# EAGLE board v002 (EAGLE 6.4)
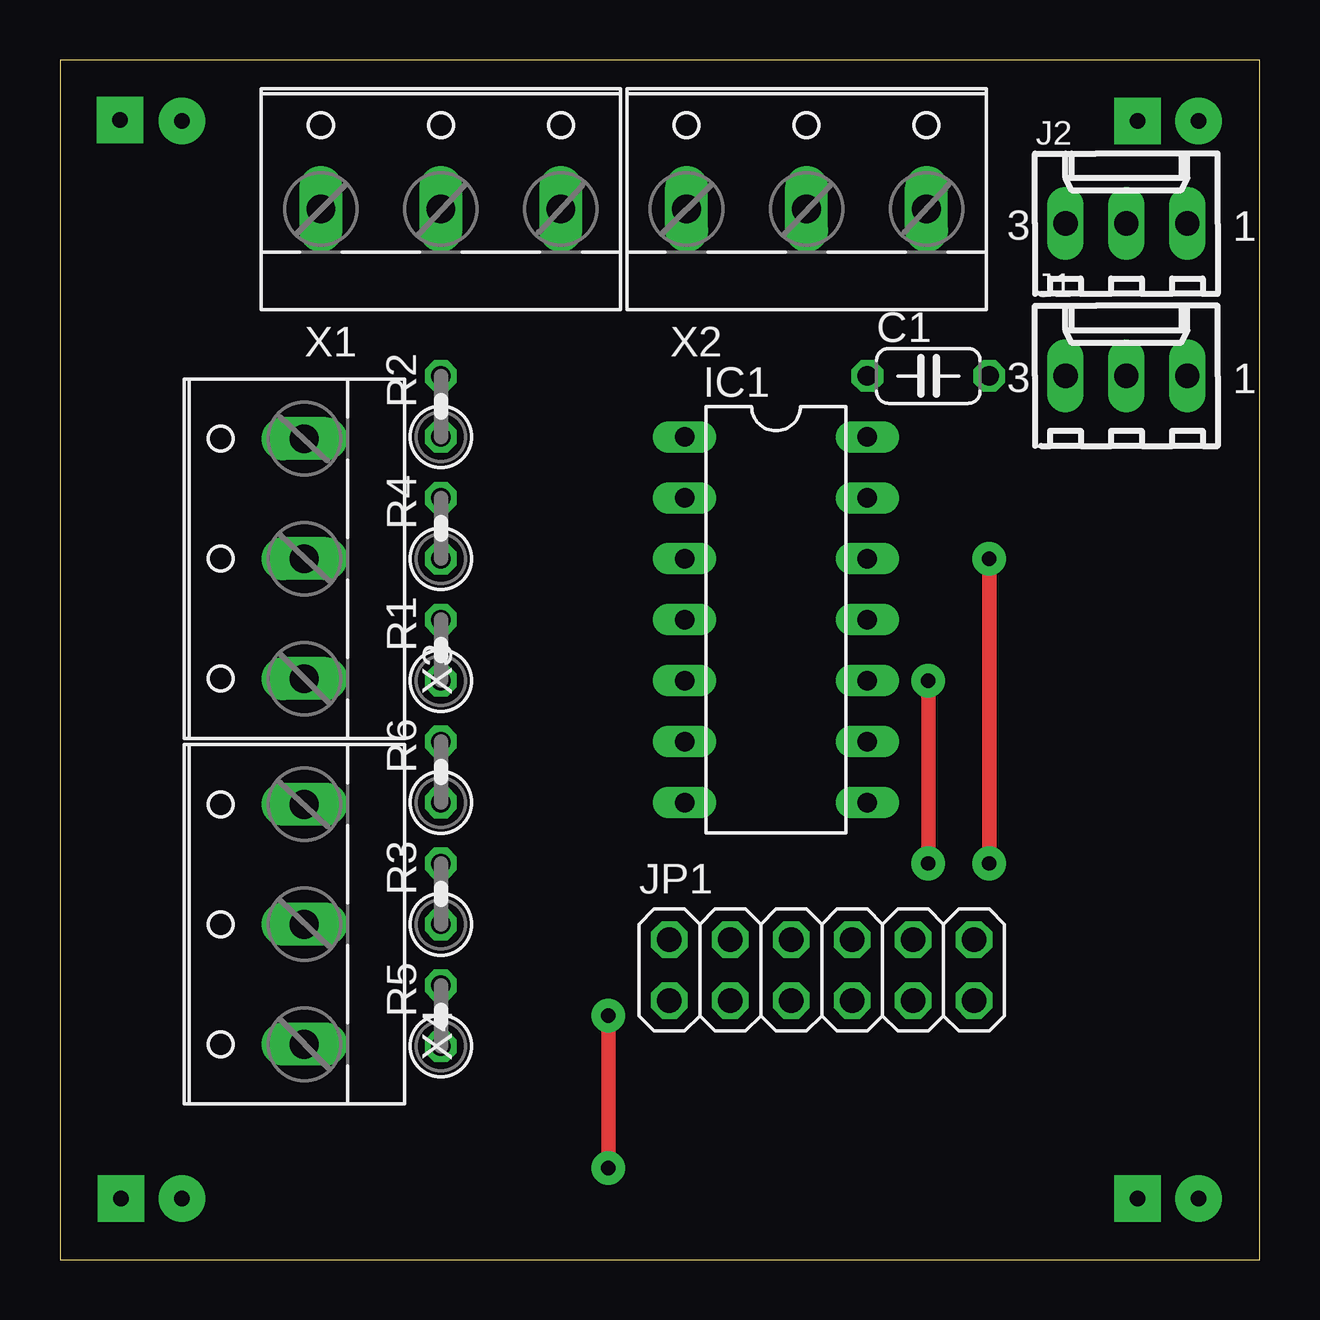
[diagram p0: board, top side]
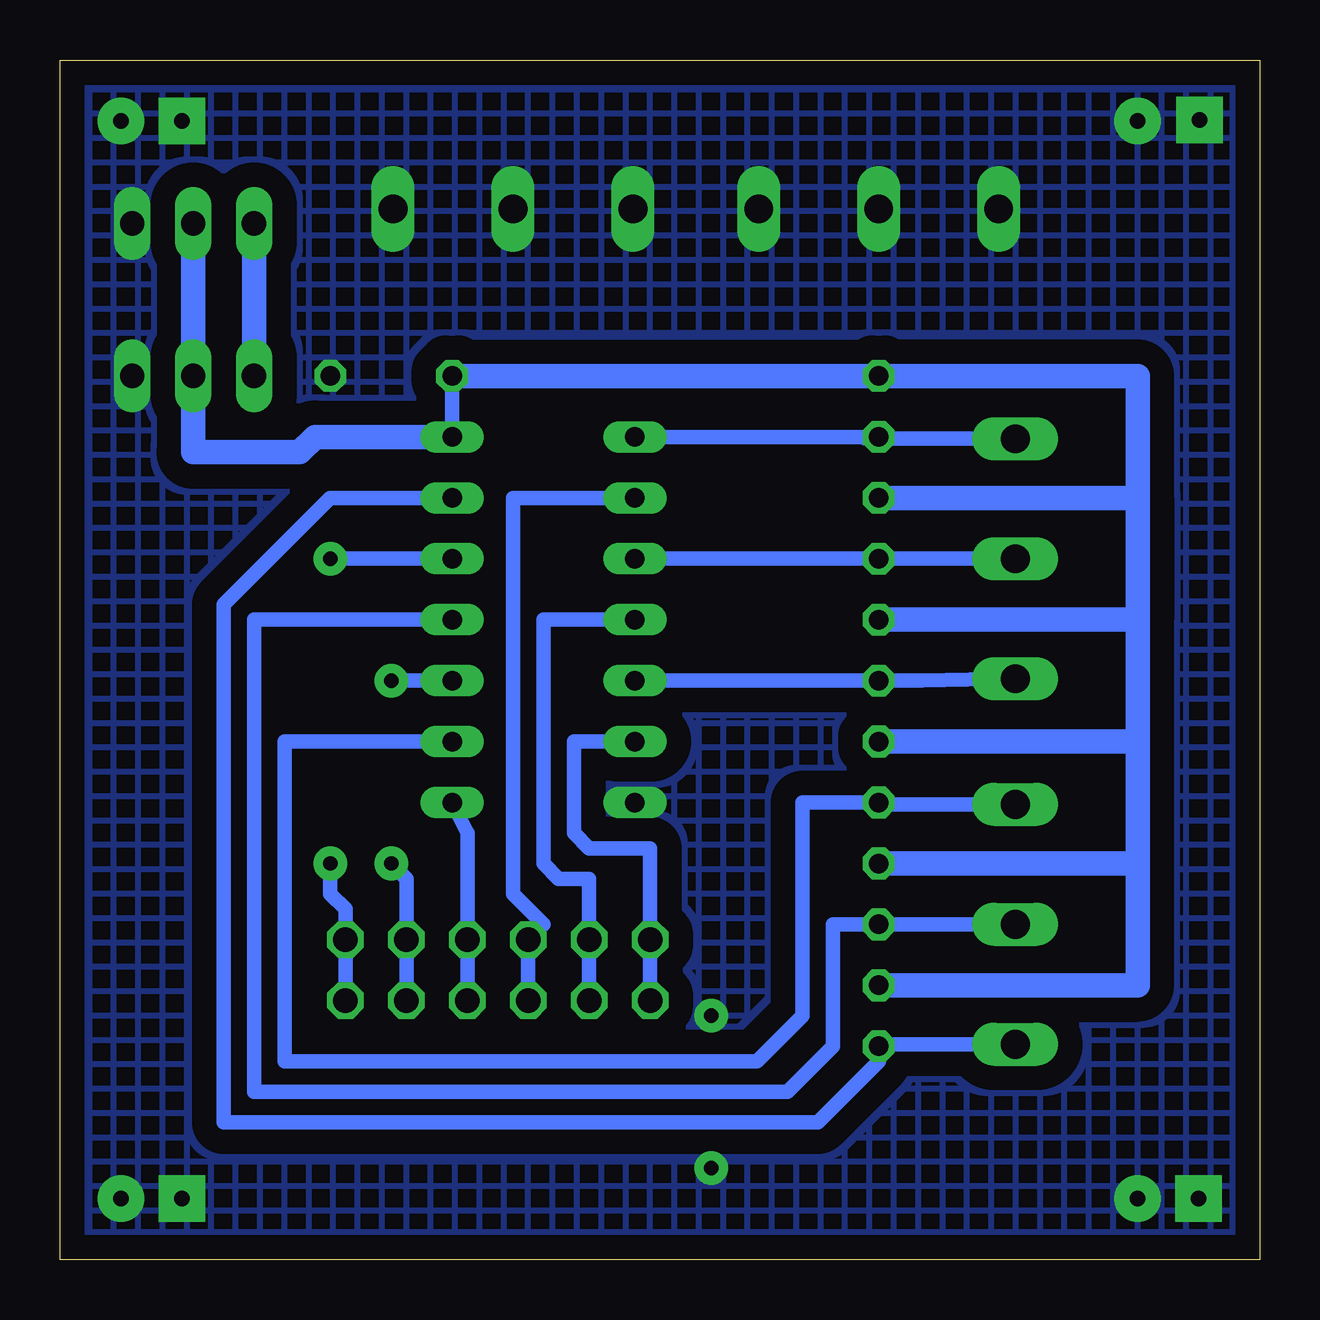
[diagram p1: board, bottom side, seen from below]

Size 50 x 50 mm. Coordinates in mm from the lower left corner, seen from the top.
Outline: 0,0 50,0 50,50 0,50 0,0
Copper layers (1*16): Top 0.035mm / dielectric 1.5mm / Bottom 0.035mm
Design rules "default": minimum track width 10mil, minimum drill 24mil, track to track 8mil, track to pad 8mil, pad to pad 8mil, via to via 8mil, smd to smd 8mil, copper to edge 40mil, drill to drill 8mil, minimum pad ring 10mil, minimum via ring 8mil, stop-mask expansion 4mil, vias tented up to drill 0mil, thermal gap 10mil

## Footprints (pad centres in the part's own frame; a part is rotated, then mirrored left to right if it is on the bottom)
C050-024X044 = drill 0.813 octagon: 1 -2.54,0; 2 2.54,0
DIL14 = drill 0.813 long: 1 -7.62,-3.81; 2 -5.08,-3.81; 3 -2.54,-3.81; 4 0,-3.81; 5 2.54,-3.81; 6 5.08,-3.81; 7 7.62,-3.81; 8 7.62,3.81; 9 5.08,3.81; 10 2.54,3.81; 11 0,3.81; 12 -2.54,3.81; 13 -5.08,3.81; 14 -7.62,3.81
6410-03 = drill 1.016 long: 1 2.54,0; 2 0,0; 3 -2.54,0
2X06 = drill 1.016 octagon: 1 -6.35,-1.27; 2 -6.35,1.27; 3 -3.81,-1.27; 4 -3.81,1.27; 5 -1.27,-1.27; 6 -1.27,1.27; 7 1.27,-1.27; 8 1.27,1.27; 9 3.81,-1.27; 10 3.81,1.27; 11 6.35,-1.27; 12 6.35,1.27
ZZZ_MODULE_05X05 = drill 0.64 pad 1.93 square: GND@1 2.5,47.5; GND@2 44.92,47.46; GND@7 2.54,2.54; GND@8 44.92,2.54 | drill 0.64 pad 1.93: GND@3 47.46,47.46; GND@4 5.08,47.46; GND@5 47.46,2.54; GND@6 5.08,2.54
0207/2V = drill 0.813 octagon: 1 -1.27,0; 2 1.27,0
W237-103 = drill 1.194 long: 1 -5,-1.29; 2 0,-1.29; 3 5,-1.29

## Placement (x,y rotation side)
C1  0.1uF  [C050-024X044]  36.2,36.83 0 top
IC1  7404  [DIL14]  29.84,26.67 270 top
J1  Pwr-1  [6410-03]  44.45,36.83 0 top
J2  Pwr-2  [6410-03]  44.45,43.18 0 top
JP1  Output  [2X06]  31.75,12.06 0 top
PCB1  ZZZ_MODULE05X05  [ZZZ_MODULE_05X05]  0,0 0 top
R1  10K  [0207/2V]  15.88,25.4 90 top
R2  10K  [0207/2V]  15.88,35.56 90 top
R3  10K  [0207/2V]  15.88,15.24 90 top
R4  10K  [0207/2V]  15.88,30.48 90 top
R5  10K  [0207/2V]  15.88,10.16 90 top
R6  10K  [0207/2V]  15.88,20.32 90 top
X1  GND  [W237-103]  15.88,45.09 0 top
X2  GND  [W237-103]  31.11,45.09 0 top
X3  [W237-103]  8.89,29.21 90 top
X4  [W237-103]  8.89,13.97 90 top

## Library data of the parts
C1 = rcl
IC1 = 45xx
J1 J2 = con-molex; OC_FARNELL: unknown; OC_NEWARK: unknown
JP1 = pinhead
PCB1 = GNLib
R1-R6 = resistor
X1-X4 = con-wago-500; MPN: 237-103; OC_FARNELL: unknown; OC_NEWARK: 18M7116

## Nets
+5V: C1.1 IC1.14 J1.2 J2.2 R1.2 R2.2 R3.2 R4.2 R5.2 R6.2
+12V: J1.3 J2.3
GND: C1.2 IC1.7 J1.1 J2.1 PCB1.GND@1 PCB1.GND@2 PCB1.GND@3 PCB1.GND@4 PCB1.GND@5 PCB1.GND@6 PCB1.GND@7 PCB1.GND@8 X1.1 X1.2 X1.3 X2.1 X2.2 X2.3
N$1: IC1.2 JP1.5 JP1.6
N$2: IC1.1 R2.1 X3.3
N$3: IC1.6 JP1.1 JP1.2
N$4: IC1.5 R1.1 X3.1
N$6: IC1.11 R3.1 X4.2
N$7: IC1.10 JP1.9 JP1.10
N$8: IC1.3 R4.1 X3.2
N$9: IC1.12 JP1.11 JP1.12
N$10: IC1.13 R5.1 X4.1
N$11: IC1.8 JP1.7 JP1.8
N$12: IC1.9 R6.1 X4.3
N$13: IC1.4 JP1.3 JP1.4

## Tracks (layer width: path | path; a pad name or v marks a point on that pad's centre or on a via)
+5V
  Bottom 0.61: C1.1 IC1.14
  Bottom 1.016: 5.08,31.75 5.08,36.83 R2.2 C1.1 | R4.2 5.08,31.75 | 5.08,31.75 5.08,26.67 | R1.2 5.08,26.67 | R6.2 5.08,21.59 | 5.08,21.59 5.08,26.67 | R3.2 5.08,16.51 | 5.08,16.51 5.08,21.59 | R5.2 5.08,11.43 5.08,16.51 | J2.2 J1.2 44.45,33.66 40.01,33.66 39.37,34.29 IC1.14
+12V
  Bottom 1.016: J2.3 J1.3
GND  (via drill 0.6 pad 1.4)
  Top 0.61: v22.86,10.16 v22.86,3.81
  pour Bottom (isolate 1.016, no thermals, hatched): 50.16,50.16 0,50.16 0,0 50.16,0
N$1
  Bottom 0.61: IC1.2 31.11,31.75 31.11,15.24 29.84,13.97 JP1.6 JP1.5
N$2
  Bottom 0.61: IC1.1 16.51,34.29 | 16.51,34.29 R2.1 | X3.3 16.43,34.21 16.51,34.29
N$3
  Bottom 0.61: JP1.1 JP1.2 25.4,17.14 27.94,17.14 28.57,17.78 28.57,21.59 IC1.6
N$4
  Bottom 0.61: X3.1 14.07,24.13 R1.1 IC1.5
N$6
  Bottom 0.61: IC1.11 41.91,26.67 41.91,6.99 19.68,6.99 17.78,8.89 17.78,13.97 R3.1 X4.2
N$7  (via drill 0.6 pad 1.4)
  Top 0.61: v36.2,24.13 v36.2,16.51
  Bottom 0.61: JP1.9 JP1.10 35.56,15.88 v36.2,16.51 | IC1.10 v36.2,24.13
N$8
  Bottom 0.61: X3.2 R4.1 IC1.3
N$9  (via drill 0.6 pad 1.4)
  Top 0.61: v38.73,16.51 v38.73,29.21
  Bottom 0.61: JP1.11 JP1.12 38.1,14.61 38.73,15.24 v38.73,16.51 | v38.73,29.21 IC1.12
N$10
  Bottom 0.61: IC1.13 38.73,31.75 43.18,27.3 43.18,5.71 18.41,5.71 15.88,8.26 R5.1 15.79,8.97 X4.1
N$11
  Bottom 0.61: JP1.7 JP1.8 33.02,17.78 IC1.8
N$12
  Bottom 0.61: IC1.9 40.64,21.59 40.64,8.26 20.95,8.26 19.05,10.16 19.05,19.05 R6.1 15.79,18.97 X4.3
N$13
  Bottom 0.61: IC1.4 29.84,26.67 29.84,16.51 29.21,15.88 27.94,15.88 JP1.4 JP1.3